# Altium PCB nrf24l01_cell(P40).PcbDoc (part 11 of 11)
Units mm, origin at the board's own origin, x right, y up, seen from the top; angles counter-clockwise.
Board outline 136.2 x 112.2 mm, 2 copper layers (TopLayer, BottomLayer); 520 components, 0 nets, 2804 pads, 1040 vias.
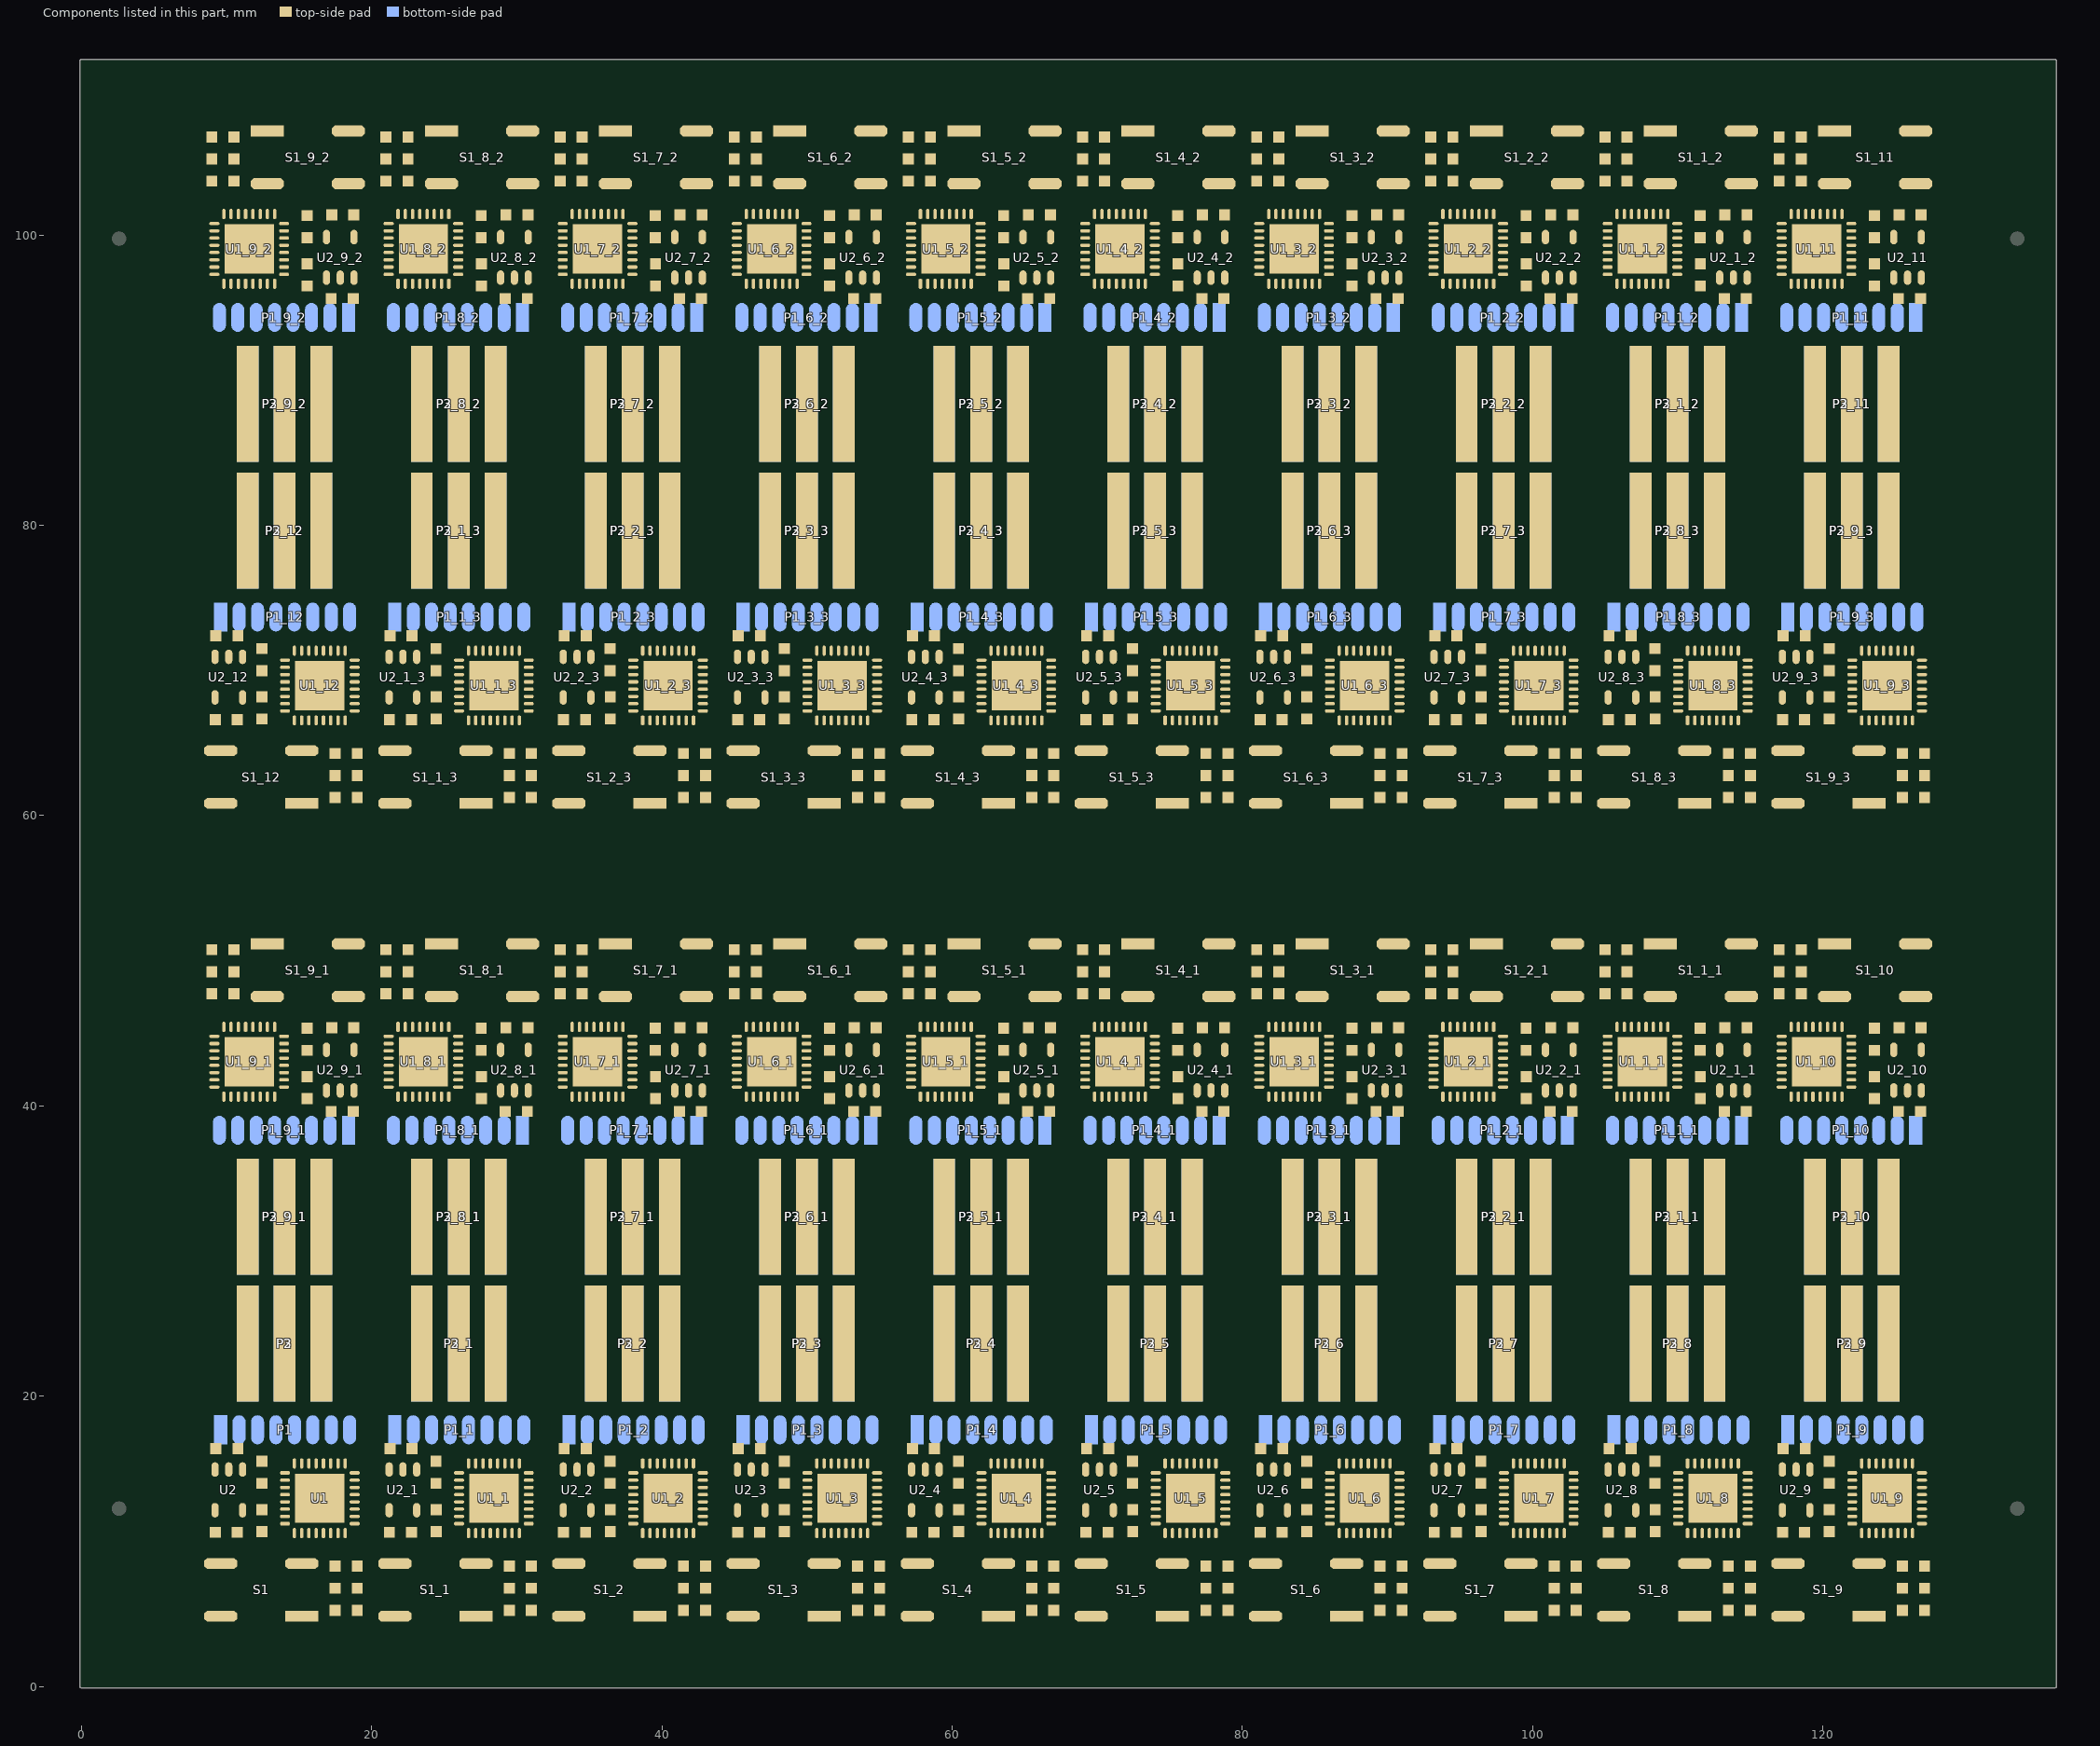
[diagram p11: the components of this part, seen from the top]

## Polygon pours and split planes (outlines as drawn) (continued)
no net on BottomLayer "TopLayer-No Net" (solid, remove dead copper): 80,19 68,19 68,5.95 79.98,5.95 80,5.93
no net on BottomLayer "TopLayer-No Net" (solid, remove dead copper): 68,19 56,19 56,5.95 67.98,5.95 68,5.93
no net on BottomLayer "TopLayer-No Net" (solid, remove dead copper): 56,19 44,19 44,5.95 55.98,5.95 56,5.93
no net on BottomLayer "TopLayer-No Net" (solid, remove dead copper): 44,19 32,19 32,5.95 43.98,5.95 44,5.93
no net on BottomLayer "TopLayer-No Net" (solid, remove dead copper): 32,19 20,19 20,5.95 31.98,5.95 32,5.93
no net on BottomLayer "TopLayer-No Net" (solid, remove dead copper): 20,19 8,19 8,5.95 19.98,5.95 20,5.93
no net on TopLayer "TopLayer-No Net" (solid, remove dead copper): 8,61.95 8.05,61.9 20,61.9 20,75 8,75
no net on TopLayer "TopLayer-No Net" (solid, remove dead copper): 20,61.95 20.05,61.9 32,61.9 32,75 20,75
no net on TopLayer "TopLayer-No Net" (solid, remove dead copper): 32,61.95 32.05,61.9 44,61.9 44,75 32,75
no net on TopLayer "TopLayer-No Net" (solid, remove dead copper): 44,61.95 44.05,61.9 56,61.9 56,75 44,75
no net on TopLayer "TopLayer-No Net" (solid, remove dead copper): 56,61.95 56.05,61.9 68,61.9 68,75 56,75
no net on TopLayer "TopLayer-No Net" (solid, remove dead copper): 68,61.95 68.05,61.9 80,61.9 80,75 68,75
no net on TopLayer "TopLayer-No Net" (solid, remove dead copper): 80,61.95 80.05,61.9 92,61.9 92,75 80,75
no net on TopLayer "TopLayer-No Net" (solid, remove dead copper): 92,61.95 92.05,61.9 104,61.9 104,75 92,75
no net on TopLayer "TopLayer-No Net" (solid, remove dead copper): 104,61.95 104.05,61.9 116,61.9 116,75 104,75
no net on TopLayer "TopLayer-No Net" (solid, remove dead copper): 116,61.95 116.05,61.9 128,61.9 128,75 116,75
no net on TopLayer "TopLayer-No Net" (solid, remove dead copper): 128,106.05 127.95,106.1 116,106.1 116,93 128,93
no net on TopLayer "TopLayer-No Net" (solid, remove dead copper): 116,106.05 115.95,106.1 104,106.1 104,93 116,93
no net on TopLayer "TopLayer-No Net" (solid, remove dead copper): 104,106.05 103.95,106.1 92,106.1 92,93 104,93
no net on TopLayer "TopLayer-No Net" (solid, remove dead copper): 92,106.05 91.95,106.1 80,106.1 80,93 92,93
no net on TopLayer "TopLayer-No Net" (solid, remove dead copper): 80,106.05 79.95,106.1 68,106.1 68,93 80,93
no net on TopLayer "TopLayer-No Net" (solid, remove dead copper): 68,106.05 67.95,106.1 56,106.1 56,93 68,93
no net on TopLayer "TopLayer-No Net" (solid, remove dead copper): 56,106.05 55.95,106.1 44,106.1 44,93 56,93
no net on TopLayer "TopLayer-No Net" (solid, remove dead copper): 44,106.05 43.95,106.1 32,106.1 32,93 44,93
no net on TopLayer "TopLayer-No Net" (solid, remove dead copper): 32,106.05 31.95,106.1 20,106.1 20,93 32,93
no net on TopLayer "TopLayer-No Net" (solid, remove dead copper): 20,106.05 19.95,106.1 8,106.1 8,93 20,93
no net on TopLayer "TopLayer-No Net" (solid, remove dead copper): 128,50.05 127.95,50.1 116,50.1 116,37 128,37
no net on TopLayer "TopLayer-No Net" (solid, remove dead copper): 116,50.05 115.95,50.1 104,50.1 104,37 116,37
no net on TopLayer "TopLayer-No Net" (solid, remove dead copper): 104,50.05 103.95,50.1 92,50.1 92,37 104,37
no net on TopLayer "TopLayer-No Net" (solid, remove dead copper): 92,50.05 91.95,50.1 80,50.1 80,37 92,37
no net on TopLayer "TopLayer-No Net" (solid, remove dead copper): 80,50.05 79.95,50.1 68,50.1 68,37 80,37
no net on TopLayer "TopLayer-No Net" (solid, remove dead copper): 68,50.05 67.95,50.1 56,50.1 56,37 68,37
no net on TopLayer "TopLayer-No Net" (solid, remove dead copper): 56,50.05 55.95,50.1 44,50.1 44,37 56,37
no net on TopLayer "TopLayer-No Net" (solid, remove dead copper): 44,50.05 43.95,50.1 32,50.1 32,37 44,37
no net on TopLayer "TopLayer-No Net" (solid, remove dead copper): 32,50.05 31.95,50.1 20,50.1 20,37 32,37
no net on TopLayer "TopLayer-No Net" (solid, remove dead copper): 20,50.05 19.95,50.1 8,50.1 8,37 20,37
no net on TopLayer "TopLayer-No Net" (solid, remove dead copper): 116,5.95 116.05,5.9 128,5.9 128,19 116,19
no net on TopLayer "TopLayer-No Net" (solid, remove dead copper): 104,5.95 104.05,5.9 116,5.9 116,19 104,19
no net on TopLayer "TopLayer-No Net" (solid, remove dead copper): 92,5.95 92.05,5.9 104,5.9 104,19 92,19
no net on TopLayer "TopLayer-No Net" (solid, remove dead copper): 80,5.95 80.05,5.9 92,5.9 92,19 80,19
no net on TopLayer "TopLayer-No Net" (solid, remove dead copper): 68,5.95 68.05,5.9 80,5.9 80,19 68,19
no net on TopLayer "TopLayer-No Net" (solid, remove dead copper): 56,5.95 56.05,5.9 68,5.9 68,19 56,19
no net on TopLayer "TopLayer-No Net" (solid, remove dead copper): 44,5.95 44.05,5.9 56,5.9 56,19 44,19
no net on TopLayer "TopLayer-No Net" (solid, remove dead copper): 32,5.95 32.05,5.9 44,5.9 44,19 32,19
no net on TopLayer "TopLayer-No Net" (solid, remove dead copper): 20,5.95 20.05,5.9 32,5.9 32,19 20,19
no net on TopLayer "TopLayer-No Net" (solid, remove dead copper): 8,5.95 8.05,5.9 20,5.9 20,19 8,19

## Keep-outs
KeepOutLayer:
  circle w0.2: c2.6,5 r1
  circle w0.2: c2.6,107 r1
  circle w0.2: c133.4,107 r1
  circle w0.2: c133.4,5 r1
  lines w0.2: 127,37 127,28 ; 128,37 129,37 129,28 129,19 128,19 ; 0,0 ccw(c0,0) 0,0 ; 0,0 8,0 ; 0,0 0,112 8,112 ; 8,0 8,19 ; 8,0 20,0 ; 8,19 9,19 9,28 ; 8,19 7,19 7,28 7,37 8,37 ; 8,37 8,56 ; 8,37 9,37 9,28 ; 8,56 8,75 ; 8,56 20,56 ; 8,75 9,75 9,84 ; 8,75 7,75 7,84 7,93 8,93 ; 8,93 8,112 ; 8,93 9,93 9,84 ; 8,112 20,112 ; 9,28 19,28 ; 9,28 19,28 ; 9,84 19,84 ; 9,84 19,84 ; 19,28 19,37 20,37 ; 19,28 19,19 20,19 ; 19,84 19,75 20,75 ; 19,84 19,93 20,93 ; 20,0 20,19 ; 20,0 32,0 ; 20,0 20,19 ; 20,19 21,19 21,28 ; 20,37 20,56 ; 20,37 21,37 21,28 ; 20,37 20,56 ; 20,56 20,75 ; 20,56 32,56 ; 20,56 20,75 ; 20,56 32,56 ; 20,75 21,75 21,84 ; 20,93 20,112 ; 20,93 21,93 21,84 ; 20,93 20,112 ; 20,112 32,112 ; 21,28 31,28 ; 21,28 31,28 ; 21,84 31,84 ; 21,84 31,84 ; 31,28 31,37 32,37 ; 31,28 31,19 32,19 ; 31,84 31,75 32,75 ; 31,84 31,93 32,93 ; 32,0 32,19 ; 32,0 44,0 ; 32,0 32,19 ; 32,19 33,19 33,28 ; 32,37 32,56 ; 32,37 33,37 33,28 ; 32,37 32,56 ; 32,56 32,75 ; 32,56 44,56 ; 32,56 32,75 ; 32,56 44,56 ; 32,75 33,75 33,84 ; 32,93 32,112 ; 32,93 33,93 33,84 ; 32,93 32,112 ; 32,112 44,112 ; 33,28 43,28 ; 33,28 43,28 ; 33,84 43,84 ; 33,84 43,84 ; 43,28 43,37 44,37 ; 43,28 43,19 44,19 ; 43,84 43,75 44,75 ; 43,84 43,93 44,93 ; 44,0 44,19 ; 44,0 56,0 ; 44,0 44,19 ; 44,19 45,19 45,28 ; 44,37 44,56 ; 44,37 45,37 45,28 ; 44,37 44,56 ; 44,56 44,75 ; 44,56 56,56 ; 44,56 44,75 ; 44,56 56,56 ; 44,75 45,75 45,84 ; 44,93 44,112 ; 44,93 45,93 45,84 ; 44,93 44,112 ; 44,112 56,112 ; 45,28 55,28 ; 45,28 55,28 ; 45,84 55,84 ; 45,84 55,84 ; 55,28 55,37 56,37 ; 55,28 55,19 56,19 ; 55,84 55,75 56,75 ; 55,84 55,93 56,93 ; 56,0 56,19 ; 56,0 68,0 ; 56,0 56,19 ; 56,19 57,19 57,28 ; 56,37 56,56 ; 56,37 57,37 57,28 ; 56,37 56,56 ; 56,56 56,75 ; 56,56 68,56 ; 56,56 56,75 ; 56,56 68,56 ; 56,75 57,75 57,84 ; 56,93 56,112 ; 56,93 57,93 57,84 ; 56,93 56,112 ; 56,112 68,112 ; 57,28 67,28 ; 57,28 67,28 ; 57,84 67,84 ; 57,84 67,84 ; 67,28 67,37 68,37 ; 67,28 67,19 68,19 ; 67,84 67,75 68,75 ; 67,84 67,93 68,93 ; 68,0 68,19 ; 68,0 80,0 ; 68,0 68,19 ; 68,19 69,19 69,28 ; 68,37 68,56 ; 68,37 69,37 69,28 ; 68,37 68,56 ; 68,56 68,75 ; 68,56 80,56 ; 68,56 68,75 ; 68,56 80,56 ; 68,75 69,75 69,84 ; 68,93 68,112 ; 68,93 69,93 69,84 ; 68,93 68,112 ; 68,112 80,112 ; 69,28 79,28 ; 69,28 79,28 ; 69,84 79,84 ; 69,84 79,84 ; 79,28 79,37 80,37 ; 79,28 79,19 80,19 ; 79,84 79,75 80,75 ; 79,84 79,93 80,93 ; 80,0 80,19 ; 80,0 92,0 ; 80,0 80,19 ; 80,19 81,19 81,28 ; 80,37 80,56 ; 80,37 81,37 81,28 ; 80,37 80,56 ; 80,56 80,75 ; 80,56 92,56 ; 80,56 80,75 ; 80,56 92,56 ; 80,75 81,75 81,84 ; 80,93 80,112 ; 80,93 81,93 81,84 ; 80,93 80,112 ; 80,112 92,112 ; 81,28 91,28 ; 81,28 91,28 ; 81,84 91,84 ; 81,84 91,84 ; 91,28 91,37 92,37 ; 91,28 91,19 92,19 ; 91,84 91,75 92,75 ; 91,84 91,93 92,93 ; 92,0 92,19 ; 92,0 104,0 ; 92,0 92,19 ; 92,19 93,19 93,28 ; 92,37 92,56 ; 92,37 93,37 93,28 ; 92,37 92,56 ; 92,56 92,75 ; 92,56 104,56 ; 92,56 92,75 ; 92,56 104,56 ; 92,75 93,75 93,84 ; 92,93 92,112 ; 92,93 93,93 93,84 ; 92,93 92,112 ; 92,112 104,112 ; 93,28 103,28 ; 93,28 103,28 ; 93,84 103,84 ; 93,84 103,84 ; 103,28 103,37 104,37 ; 103,28 103,19 104,19 ; 103,84 103,75 104,75 ; 103,84 103,93 104,93 ; 104,0 104,19 ; 104,0 116,0 ; 104,0 104,19 ; 104,19 105,19 105,28 ; 104,37 104,56 ; 104,37 105,37 105,28 ; 104,37 104,56 ; 104,56 104,75 ; 104,56 116,56 ; 104,56 104,75 ; 104,56 116,56 ; 104,75 105,75 105,84 ; 104,93 104,112 ; 104,93 105,93 105,84 ; 104,93 104,112 ; 104,112 116,112 ; 105,28 115,28 ; 105,28 115,28 ; 105,84 115,84 ; 105,84 115,84 ; 115,28 115,37 116,37 ; 115,28 115,19 116,19 ; 115,84 115,75 116,75 ; 115,84 115,93 116,93 ; 116,0 116,19 ; 116,0 128,0 ; 116,0 116,19 ; 116,19 117,19 117,28 ; 116,37 116,56 ; 116,37 117,37 117,28 ; 116,37 116,56 ; 116,56 116,75 ; 116,56 128,56 128,75 ; 116,56 116,75 ; 116,75 117,75 117,84 ; 116,93 116,112 ; 116,93 117,93 117,84 ; 116,93 116,112 ; 116,112 128,112 ; 117,28 127,28 ; 117,28 127,28 ; 117,84 127,84 ; 117,84 127,84 ; 127,28 127,19 128,19 ; 127,84 127,75 128,75 ; 127,84 127,93 128,93 ; 128,0 128,19 ; 128,0 136,0 136,112 128,112 ; 128,75 129,75 129,84 129,93 128,93 ; 128,93 128,112

## Other copper
TopLayer:
  region: 10.71,65.92 9.24,65.92 9.24,65.18 10.71,65.18
  region: 22.71,65.92 21.24,65.92 21.24,65.18 22.71,65.18
  region: 34.71,65.92 33.24,65.92 33.24,65.18 34.71,65.18
  region: 46.71,65.92 45.24,65.92 45.24,65.18 46.71,65.18
  region: 58.71,65.92 57.24,65.92 57.24,65.18 58.71,65.18
  region: 70.71,65.92 69.24,65.92 69.24,65.18 70.71,65.18
  region: 82.71,65.92 81.24,65.92 81.24,65.18 82.71,65.18
  region: 94.71,65.92 93.24,65.92 93.24,65.18 94.71,65.18
  region: 106.71,65.92 105.24,65.92 105.24,65.18 106.71,65.18
  region: 118.71,65.92 117.24,65.92 117.24,65.18 118.71,65.18
  rectangle: 125.29,102.08 126.76,102.82
  rectangle: 113.29,102.08 114.76,102.82
  rectangle: 101.29,102.08 102.76,102.82
  rectangle: 89.29,102.08 90.76,102.82
  rectangle: 77.29,102.08 78.76,102.82
  rectangle: 65.29,102.08 66.76,102.82
  rectangle: 53.29,102.08 54.76,102.82
  rectangle: 41.29,102.08 42.76,102.82
  rectangle: 29.29,102.08 30.76,102.82
  rectangle: 17.29,102.08 18.76,102.82
  rectangle: 125.29,46.08 126.76,46.82
  rectangle: 113.29,46.08 114.76,46.82
  rectangle: 101.29,46.08 102.76,46.82
  rectangle: 89.29,46.08 90.76,46.82
  rectangle: 77.29,46.08 78.76,46.82
  rectangle: 65.29,46.08 66.76,46.82
  rectangle: 53.29,46.08 54.76,46.82
  rectangle: 41.29,46.08 42.76,46.82
  rectangle: 29.29,46.08 30.76,46.82
  rectangle: 17.29,46.08 18.76,46.82
  region: 118.71,9.92 117.24,9.92 117.24,9.18 118.71,9.18
  region: 106.71,9.92 105.24,9.92 105.24,9.18 106.71,9.18
  region: 94.71,9.92 93.24,9.92 93.24,9.18 94.71,9.18
  region: 82.71,9.92 81.24,9.92 81.24,9.18 82.71,9.18
  region: 70.71,9.92 69.24,9.92 69.24,9.18 70.71,9.18
  region: 58.71,9.92 57.24,9.92 57.24,9.18 58.71,9.18
  region: 46.71,9.92 45.24,9.92 45.24,9.18 46.71,9.18
  region: 34.71,9.92 33.24,9.92 33.24,9.18 34.71,9.18
  region: 22.71,9.92 21.24,9.92 21.24,9.18 22.71,9.18
  region: 10.71,9.92 9.24,9.92 9.24,9.18 10.71,9.18
BottomLayer:
  region: 10.66,66.49 9.45,66.49 9.45,64.79 10.66,64.79
  region: 10.76,72.34 9.74,72.34 9.74,71.11 10.76,71.11
  region: 12.74,71.32 11.66,71.32 11.66,69.93 12.74,69.93
  region: 13.06,71.66 11.25,71.66 11.25,70.41 13.06,70.41
  region: 18.53,70.95 17.36,70.95 17.36,69.84 18.53,69.84
  region: 18.63,68.13 17.25,68.13 17.25,66.94 18.63,66.94
  region: 15.55,70.92 14.38,70.92 14.38,69.86 15.55,69.86
  region: 15.51,68.09 15.03,68.09 15.03,67.6 15.51,67.6
  region: 22.66,66.49 21.45,66.49 21.45,64.79 22.66,64.79
  region: 22.76,72.34 21.74,72.34 21.74,71.11 22.76,71.11
  region: 24.74,71.32 23.66,71.32 23.66,69.93 24.74,69.93
  region: 25.06,71.66 23.25,71.66 23.25,70.41 25.06,70.41
  region: 30.53,70.95 29.36,70.95 29.36,69.84 30.53,69.84
  region: 30.63,68.13 29.25,68.13 29.25,66.94 30.63,66.94
  region: 27.55,70.92 26.38,70.92 26.38,69.86 27.55,69.86
  region: 27.51,68.09 27.03,68.09 27.03,67.6 27.51,67.6
  region: 34.66,66.49 33.45,66.49 33.45,64.79 34.66,64.79
  region: 34.76,72.34 33.74,72.34 33.74,71.11 34.76,71.11
  region: 36.74,71.32 35.66,71.32 35.66,69.93 36.74,69.93
  region: 37.06,71.66 35.25,71.66 35.25,70.41 37.06,70.41
  region: 42.53,70.95 41.36,70.95 41.36,69.84 42.53,69.84
  region: 42.63,68.13 41.25,68.13 41.25,66.94 42.63,66.94
  region: 39.55,70.92 38.38,70.92 38.38,69.86 39.55,69.86
  region: 39.51,68.09 39.03,68.09 39.03,67.6 39.51,67.6
  region: 46.66,66.49 45.45,66.49 45.45,64.79 46.66,64.79
  region: 46.76,72.34 45.74,72.34 45.74,71.11 46.76,71.11
  region: 48.74,71.32 47.66,71.32 47.66,69.93 48.74,69.93
  region: 49.06,71.66 47.25,71.66 47.25,70.41 49.06,70.41
  region: 54.53,70.95 53.36,70.95 53.36,69.84 54.53,69.84
  region: 54.63,68.13 53.25,68.13 53.25,66.94 54.63,66.94
  region: 51.55,70.92 50.38,70.92 50.38,69.86 51.55,69.86
  region: 51.51,68.09 51.03,68.09 51.03,67.6 51.51,67.6
  region: 58.66,66.49 57.45,66.49 57.45,64.79 58.66,64.79
  region: 58.76,72.34 57.74,72.34 57.74,71.11 58.76,71.11
  region: 60.74,71.32 59.66,71.32 59.66,69.93 60.74,69.93
  region: 61.06,71.66 59.25,71.66 59.25,70.41 61.06,70.41
  region: 66.53,70.95 65.36,70.95 65.36,69.84 66.53,69.84
  region: 66.63,68.13 65.25,68.13 65.25,66.94 66.63,66.94
  region: 63.55,70.92 62.38,70.92 62.38,69.86 63.55,69.86
  region: 63.51,68.09 63.03,68.09 63.03,67.6 63.51,67.6
  region: 70.66,66.49 69.45,66.49 69.45,64.79 70.66,64.79
  region: 70.76,72.34 69.74,72.34 69.74,71.11 70.76,71.11
  region: 72.74,71.32 71.66,71.32 71.66,69.93 72.74,69.93
  region: 73.06,71.66 71.25,71.66 71.25,70.41 73.06,70.41
  region: 78.53,70.95 77.36,70.95 77.36,69.84 78.53,69.84
  region: 78.63,68.13 77.25,68.13 77.25,66.94 78.63,66.94
  region: 75.55,70.92 74.38,70.92 74.38,69.86 75.55,69.86
  region: 75.51,68.09 75.03,68.09 75.03,67.6 75.51,67.6
  region: 82.66,66.49 81.45,66.49 81.45,64.79 82.66,64.79
  region: 82.76,72.34 81.74,72.34 81.74,71.11 82.76,71.11
  region: 84.74,71.32 83.66,71.32 83.66,69.93 84.74,69.93
  region: 85.06,71.66 83.25,71.66 83.25,70.41 85.06,70.41
  region: 90.53,70.95 89.36,70.95 89.36,69.84 90.53,69.84
  region: 90.63,68.13 89.25,68.13 89.25,66.94 90.63,66.94
  region: 87.55,70.92 86.38,70.92 86.38,69.86 87.55,69.86
  region: 87.51,68.09 87.03,68.09 87.03,67.6 87.51,67.6
  region: 94.66,66.49 93.45,66.49 93.45,64.79 94.66,64.79
  region: 94.76,72.34 93.74,72.34 93.74,71.11 94.76,71.11
  region: 96.74,71.32 95.66,71.32 95.66,69.93 96.74,69.93
  region: 97.06,71.66 95.25,71.66 95.25,70.41 97.06,70.41
  region: 102.53,70.95 101.36,70.95 101.36,69.84 102.53,69.84
  region: 102.63,68.13 101.25,68.13 101.25,66.94 102.63,66.94
  region: 99.55,70.92 98.38,70.92 98.38,69.86 99.55,69.86
  region: 99.51,68.09 99.03,68.09 99.03,67.6 99.51,67.6
  region: 106.66,66.49 105.45,66.49 105.45,64.79 106.66,64.79
  region: 106.76,72.34 105.74,72.34 105.74,71.11 106.76,71.11
  region: 108.74,71.32 107.66,71.32 107.66,69.93 108.74,69.93
  region: 109.06,71.66 107.25,71.66 107.25,70.41 109.06,70.41
  region: 114.53,70.95 113.36,70.95 113.36,69.84 114.53,69.84
  region: 114.63,68.13 113.25,68.13 113.25,66.94 114.63,66.94
  region: 111.55,70.92 110.38,70.92 110.38,69.86 111.55,69.86
  region: 111.51,68.09 111.03,68.09 111.03,67.6 111.51,67.6
  region: 118.66,66.49 117.45,66.49 117.45,64.79 118.66,64.79
  region: 118.76,72.34 117.74,72.34 117.74,71.11 118.76,71.11
  region: 120.74,71.32 119.66,71.32 119.66,69.93 120.74,69.93
  region: 121.06,71.66 119.25,71.66 119.25,70.41 121.06,70.41
  region: 126.53,70.95 125.36,70.95 125.36,69.84 126.53,69.84
  region: 126.63,68.13 125.25,68.13 125.25,66.94 126.63,66.94
  region: 123.55,70.92 122.38,70.92 122.38,69.86 123.55,69.86
  region: 123.51,68.09 123.03,68.09 123.03,67.6 123.51,67.6
  rectangle: 125.34,101.51 126.55,103.21
  rectangle: 125.24,95.66 126.26,96.89
  rectangle: 123.26,96.68 124.34,98.07
  rectangle: 122.94,96.34 124.75,97.59
  rectangle: 117.47,97.05 118.64,98.16
  rectangle: 117.37,99.87 118.75,101.06
  rectangle: 120.45,97.08 121.62,98.14
  rectangle: 120.49,99.91 120.97,100.4
  rectangle: 113.34,101.51 114.55,103.21
  rectangle: 113.24,95.66 114.26,96.89
  rectangle: 111.26,96.68 112.34,98.07
  rectangle: 110.94,96.34 112.75,97.59
  rectangle: 105.47,97.05 106.64,98.16
  rectangle: 105.37,99.87 106.75,101.06
  rectangle: 108.45,97.08 109.62,98.14
  rectangle: 108.49,99.91 108.97,100.4
  rectangle: 101.34,101.51 102.55,103.21
  rectangle: 101.24,95.66 102.26,96.89
  rectangle: 99.26,96.68 100.34,98.07
  rectangle: 98.94,96.34 100.75,97.59
  rectangle: 93.47,97.05 94.64,98.16
  rectangle: 93.37,99.87 94.75,101.06
  rectangle: 96.45,97.08 97.62,98.14
  rectangle: 96.49,99.91 96.97,100.4
  rectangle: 89.34,101.51 90.55,103.21
  rectangle: 89.24,95.66 90.26,96.89
  rectangle: 87.26,96.68 88.34,98.07
  rectangle: 86.94,96.34 88.75,97.59
  rectangle: 81.47,97.05 82.64,98.16
  rectangle: 81.37,99.87 82.75,101.06
  rectangle: 84.45,97.08 85.62,98.14
  rectangle: 84.49,99.91 84.97,100.4
  rectangle: 77.34,101.51 78.55,103.21
  rectangle: 77.24,95.66 78.26,96.89
  rectangle: 75.26,96.68 76.34,98.07
  rectangle: 74.94,96.34 76.75,97.59
  rectangle: 69.47,97.05 70.64,98.16
  rectangle: 69.37,99.87 70.75,101.06
  rectangle: 72.45,97.08 73.62,98.14
  rectangle: 72.49,99.91 72.97,100.4
  rectangle: 65.34,101.51 66.55,103.21
  rectangle: 65.24,95.66 66.26,96.89
  rectangle: 63.26,96.68 64.34,98.07
  rectangle: 62.94,96.34 64.75,97.59
  rectangle: 57.47,97.05 58.64,98.16
  rectangle: 57.37,99.87 58.75,101.06
  rectangle: 60.45,97.08 61.62,98.14
  rectangle: 60.49,99.91 60.97,100.4
  rectangle: 53.34,101.51 54.55,103.21
  rectangle: 53.24,95.66 54.26,96.89
  rectangle: 51.26,96.68 52.34,98.07
  rectangle: 50.94,96.34 52.75,97.59
  rectangle: 45.47,97.05 46.64,98.16
  rectangle: 45.37,99.87 46.75,101.06
  rectangle: 48.45,97.08 49.62,98.14
  rectangle: 48.49,99.91 48.97,100.4
  rectangle: 41.34,101.51 42.55,103.21
  rectangle: 41.24,95.66 42.26,96.89
  rectangle: 39.26,96.68 40.34,98.07
  rectangle: 38.94,96.34 40.75,97.59
  rectangle: 33.47,97.05 34.64,98.16
  rectangle: 33.37,99.87 34.75,101.06
  rectangle: 36.45,97.08 37.62,98.14
  rectangle: 36.49,99.91 36.97,100.4
  rectangle: 29.34,101.51 30.55,103.21
  rectangle: 29.24,95.66 30.26,96.89
  rectangle: 27.26,96.68 28.34,98.07
  rectangle: 26.94,96.34 28.75,97.59
  rectangle: 21.47,97.05 22.64,98.16
  rectangle: 21.37,99.87 22.75,101.06
  rectangle: 24.45,97.08 25.62,98.14
  rectangle: 24.49,99.91 24.97,100.4
  rectangle: 17.34,101.51 18.55,103.21
  rectangle: 17.24,95.66 18.26,96.89
  rectangle: 15.26,96.68 16.34,98.07
  rectangle: 14.94,96.34 16.75,97.59
  rectangle: 9.47,97.05 10.64,98.16
  rectangle: 9.37,99.87 10.75,101.06
  rectangle: 12.45,97.08 13.62,98.14
  rectangle: 12.49,99.91 12.97,100.4
  rectangle: 125.34,45.51 126.55,47.21
  rectangle: 125.24,39.66 126.26,40.89
  rectangle: 123.26,40.68 124.34,42.07
  rectangle: 122.94,40.34 124.75,41.59
  rectangle: 117.47,41.05 118.64,42.16
  rectangle: 117.37,43.87 118.75,45.06
  rectangle: 120.45,41.08 121.62,42.14
  rectangle: 120.49,43.91 120.97,44.4
  rectangle: 113.34,45.51 114.55,47.21
  rectangle: 113.24,39.66 114.26,40.89
  rectangle: 111.26,40.68 112.34,42.07
  rectangle: 110.94,40.34 112.75,41.59
  rectangle: 105.47,41.05 106.64,42.16
  rectangle: 105.37,43.87 106.75,45.06
  rectangle: 108.45,41.08 109.62,42.14
  rectangle: 108.49,43.91 108.97,44.4
  rectangle: 101.34,45.51 102.55,47.21
  rectangle: 101.24,39.66 102.26,40.89
  rectangle: 99.26,40.68 100.34,42.07
  rectangle: 98.94,40.34 100.75,41.59
  rectangle: 93.47,41.05 94.64,42.16
  rectangle: 93.37,43.87 94.75,45.06
  rectangle: 96.45,41.08 97.62,42.14
  rectangle: 96.49,43.91 96.97,44.4
  rectangle: 89.34,45.51 90.55,47.21
  rectangle: 89.24,39.66 90.26,40.89
  rectangle: 87.26,40.68 88.34,42.07
  rectangle: 86.94,40.34 88.75,41.59
  rectangle: 81.47,41.05 82.64,42.16
  rectangle: 81.37,43.87 82.75,45.06
  rectangle: 84.45,41.08 85.62,42.14
  rectangle: 84.49,43.91 84.97,44.4
  rectangle: 77.34,45.51 78.55,47.21
  rectangle: 77.24,39.66 78.26,40.89
  rectangle: 75.26,40.68 76.34,42.07
  rectangle: 74.94,40.34 76.75,41.59
  rectangle: 69.47,41.05 70.64,42.16
  rectangle: 69.37,43.87 70.75,45.06
  rectangle: 72.45,41.08 73.62,42.14
  rectangle: 72.49,43.91 72.97,44.4
  rectangle: 65.34,45.51 66.55,47.21
  rectangle: 65.24,39.66 66.26,40.89
  rectangle: 63.26,40.68 64.34,42.07
  rectangle: 62.94,40.34 64.75,41.59
  rectangle: 57.47,41.05 58.64,42.16
  rectangle: 57.37,43.87 58.75,45.06
  rectangle: 60.45,41.08 61.62,42.14
  rectangle: 60.49,43.91 60.97,44.4
  rectangle: 53.34,45.51 54.55,47.21
  rectangle: 53.24,39.66 54.26,40.89
  rectangle: 51.26,40.68 52.34,42.07
  rectangle: 50.94,40.34 52.75,41.59
  rectangle: 45.47,41.05 46.64,42.16
  rectangle: 45.37,43.87 46.75,45.06
  rectangle: 48.45,41.08 49.62,42.14
  rectangle: 48.49,43.91 48.97,44.4
  rectangle: 41.34,45.51 42.55,47.21
  rectangle: 41.24,39.66 42.26,40.89
  rectangle: 39.26,40.68 40.34,42.07
  rectangle: 38.94,40.34 40.75,41.59
  rectangle: 33.47,41.05 34.64,42.16
  rectangle: 33.37,43.87 34.75,45.06
  rectangle: 36.45,41.08 37.62,42.14
  rectangle: 36.49,43.91 36.97,44.4
  rectangle: 29.34,45.51 30.55,47.21
  rectangle: 29.24,39.66 30.26,40.89
  rectangle: 27.26,40.68 28.34,42.07
  rectangle: 26.94,40.34 28.75,41.59
  rectangle: 21.47,41.05 22.64,42.16
  rectangle: 21.37,43.87 22.75,45.06
  rectangle: 24.45,41.08 25.62,42.14
  rectangle: 24.49,43.91 24.97,44.4
  rectangle: 17.34,45.51 18.55,47.21
  rectangle: 17.24,39.66 18.26,40.89
  rectangle: 15.26,40.68 16.34,42.07
  rectangle: 14.94,40.34 16.75,41.59
  rectangle: 9.47,41.05 10.64,42.16
  rectangle: 9.37,43.87 10.75,45.06
  rectangle: 12.45,41.08 13.62,42.14
  rectangle: 12.49,43.91 12.97,44.4
  region: 123.51,12.09 123.03,12.09 123.03,11.6 123.51,11.6
  region: 123.55,14.92 122.38,14.92 122.38,13.86 123.55,13.86
  region: 126.63,12.13 125.25,12.13 125.25,10.94 126.63,10.94
  region: 126.53,14.95 125.36,14.95 125.36,13.84 126.53,13.84
  region: 121.06,15.66 119.25,15.66 119.25,14.41 121.06,14.41
  region: 120.74,15.32 119.66,15.32 119.66,13.93 120.74,13.93
  region: 118.76,16.34 117.74,16.34 117.74,15.11 118.76,15.11
  region: 118.66,10.49 117.45,10.49 117.45,8.79 118.66,8.79
  region: 111.51,12.09 111.03,12.09 111.03,11.6 111.51,11.6
  region: 111.55,14.92 110.38,14.92 110.38,13.86 111.55,13.86
  region: 114.63,12.13 113.25,12.13 113.25,10.94 114.63,10.94
  region: 114.53,14.95 113.36,14.95 113.36,13.84 114.53,13.84
  region: 109.06,15.66 107.25,15.66 107.25,14.41 109.06,14.41
  region: 108.74,15.32 107.66,15.32 107.66,13.93 108.74,13.93
  region: 106.76,16.34 105.74,16.34 105.74,15.11 106.76,15.11
  region: 106.66,10.49 105.45,10.49 105.45,8.79 106.66,8.79
  region: 99.51,12.09 99.03,12.09 99.03,11.6 99.51,11.6
  region: 99.55,14.92 98.38,14.92 98.38,13.86 99.55,13.86
  region: 102.63,12.13 101.25,12.13 101.25,10.94 102.63,10.94
  region: 102.53,14.95 101.36,14.95 101.36,13.84 102.53,13.84
  region: 97.06,15.66 95.25,15.66 95.25,14.41 97.06,14.41
  region: 96.74,15.32 95.66,15.32 95.66,13.93 96.74,13.93
  region: 94.76,16.34 93.74,16.34 93.74,15.11 94.76,15.11
  region: 94.66,10.49 93.45,10.49 93.45,8.79 94.66,8.79
  region: 87.51,12.09 87.03,12.09 87.03,11.6 87.51,11.6
  region: 87.55,14.92 86.38,14.92 86.38,13.86 87.55,13.86
  region: 90.63,12.13 89.25,12.13 89.25,10.94 90.63,10.94
  region: 90.53,14.95 89.36,14.95 89.36,13.84 90.53,13.84
  region: 85.06,15.66 83.25,15.66 83.25,14.41 85.06,14.41
  region: 84.74,15.32 83.66,15.32 83.66,13.93 84.74,13.93
  region: 82.76,16.34 81.74,16.34 81.74,15.11 82.76,15.11
  region: 82.66,10.49 81.45,10.49 81.45,8.79 82.66,8.79
  region: 75.51,12.09 75.03,12.09 75.03,11.6 75.51,11.6
  region: 75.55,14.92 74.38,14.92 74.38,13.86 75.55,13.86
  region: 78.63,12.13 77.25,12.13 77.25,10.94 78.63,10.94
  region: 78.53,14.95 77.36,14.95 77.36,13.84 78.53,13.84
  region: 73.06,15.66 71.25,15.66 71.25,14.41 73.06,14.41
  region: 72.74,15.32 71.66,15.32 71.66,13.93 72.74,13.93
  region: 70.76,16.34 69.74,16.34 69.74,15.11 70.76,15.11
  region: 70.66,10.49 69.45,10.49 69.45,8.79 70.66,8.79
  region: 63.51,12.09 63.03,12.09 63.03,11.6 63.51,11.6
  region: 63.55,14.92 62.38,14.92 62.38,13.86 63.55,13.86
  region: 66.63,12.13 65.25,12.13 65.25,10.94 66.63,10.94
  region: 66.53,14.95 65.36,14.95 65.36,13.84 66.53,13.84
  region: 61.06,15.66 59.25,15.66 59.25,14.41 61.06,14.41
  region: 60.74,15.32 59.66,15.32 59.66,13.93 60.74,13.93
  region: 58.76,16.34 57.74,16.34 57.74,15.11 58.76,15.11
  region: 58.66,10.49 57.45,10.49 57.45,8.79 58.66,8.79
  region: 51.51,12.09 51.03,12.09 51.03,11.6 51.51,11.6
  region: 51.55,14.92 50.38,14.92 50.38,13.86 51.55,13.86
  region: 54.63,12.13 53.25,12.13 53.25,10.94 54.63,10.94
  region: 54.53,14.95 53.36,14.95 53.36,13.84 54.53,13.84
  region: 49.06,15.66 47.25,15.66 47.25,14.41 49.06,14.41
  region: 48.74,15.32 47.66,15.32 47.66,13.93 48.74,13.93
  region: 46.76,16.34 45.74,16.34 45.74,15.11 46.76,15.11
  region: 46.66,10.49 45.45,10.49 45.45,8.79 46.66,8.79
  region: 39.51,12.09 39.03,12.09 39.03,11.6 39.51,11.6
  region: 39.55,14.92 38.38,14.92 38.38,13.86 39.55,13.86
  region: 42.63,12.13 41.25,12.13 41.25,10.94 42.63,10.94
  region: 42.53,14.95 41.36,14.95 41.36,13.84 42.53,13.84
  region: 37.06,15.66 35.25,15.66 35.25,14.41 37.06,14.41
  region: 36.74,15.32 35.66,15.32 35.66,13.93 36.74,13.93
  region: 34.76,16.34 33.74,16.34 33.74,15.11 34.76,15.11
  region: 34.66,10.49 33.45,10.49 33.45,8.79 34.66,8.79
  region: 27.51,12.09 27.03,12.09 27.03,11.6 27.51,11.6
  region: 27.55,14.92 26.38,14.92 26.38,13.86 27.55,13.86
  region: 30.63,12.13 29.25,12.13 29.25,10.94 30.63,10.94
  region: 30.53,14.95 29.36,14.95 29.36,13.84 30.53,13.84
  region: 25.06,15.66 23.25,15.66 23.25,14.41 25.06,14.41
  region: 24.74,15.32 23.66,15.32 23.66,13.93 24.74,13.93
  region: 22.76,16.34 21.74,16.34 21.74,15.11 22.76,15.11
  region: 22.66,10.49 21.45,10.49 21.45,8.79 22.66,8.79
  region: 15.51,12.09 15.03,12.09 15.03,11.6 15.51,11.6
  region: 15.55,14.92 14.38,14.92 14.38,13.86 15.55,13.86
  region: 18.63,12.13 17.25,12.13 17.25,10.94 18.63,10.94
  region: 18.53,14.95 17.36,14.95 17.36,13.84 18.53,13.84
  region: 13.06,15.66 11.25,15.66 11.25,14.41 13.06,14.41
  region: 12.74,15.32 11.66,15.32 11.66,13.93 12.74,13.93
  region: 10.76,16.34 9.74,16.34 9.74,15.11 10.76,15.11
  region: 10.66,10.49 9.45,10.49 9.45,8.79 10.66,8.79

## Silkscreen, mask and mechanical layers (free items; w line width, h text height)
TopOverlay:
  text "IQIYI" at 12.22,110.17 h1.8
  text "IQIYI" at 24.22,110.17 h1.8
  text "IQIYI" at 36.22,110.17 h1.8
  text "IQIYI" at 48.22,110.17 h1.8
  text "IQIYI" at 60.22,110.17 h1.8
  text "IQIYI" at 72.22,110.17 h1.8
  text "IQIYI" at 84.22,110.17 h1.8
  text "IQIYI" at 96.22,110.17 h1.8
  text "IQIYI" at 108.22,110.17 h1.8
  text "IQIYI" at 120.22,110.17 h1.8
  text "NRF24L01 - V1.0" at 9.1,108.75 h1.4
  text "NRF24L01 - V1.0" at 21.1,108.75 h1.4
  text "NRF24L01 - V1.0" at 33.1,108.75 h1.4
  text "NRF24L01 - V1.0" at 45.1,108.75 h1.4
  text "NRF24L01 - V1.0" at 57.1,108.75 h1.4
  text "NRF24L01 - V1.0" at 69.1,108.75 h1.4
  text "NRF24L01 - V1.0" at 81.1,108.75 h1.4
  text "NRF24L01 - V1.0" at 93.1,108.75 h1.4
  text "NRF24L01 - V1.0" at 105.1,108.75 h1.4
  text "NRF24L01 - V1.0" at 117.1,108.75 h1.4
  text "NRF24L01 - V1.0" at 18.9,59.25 h1.4 r180
  text "NRF24L01 - V1.0" at 30.9,59.25 h1.4 r180
  text "NRF24L01 - V1.0" at 42.9,59.25 h1.4 r180
  text "NRF24L01 - V1.0" at 54.9,59.25 h1.4 r180
  text "NRF24L01 - V1.0" at 66.9,59.25 h1.4 r180
  text "NRF24L01 - V1.0" at 78.9,59.25 h1.4 r180
  text "NRF24L01 - V1.0" at 90.9,59.25 h1.4 r180
  text "NRF24L01 - V1.0" at 102.9,59.25 h1.4 r180
  text "NRF24L01 - V1.0" at 114.9,59.25 h1.4 r180
  text "NRF24L01 - V1.0" at 126.9,59.25 h1.4 r180
  text "IQIYI" at 15.78,57.83 h1.8 r180
  text "IQIYI" at 27.78,57.83 h1.8 r180
  text "IQIYI" at 39.78,57.83 h1.8 r180
  text "IQIYI" at 51.78,57.83 h1.8 r180
  text "IQIYI" at 63.78,57.83 h1.8 r180
  text "IQIYI" at 75.78,57.83 h1.8 r180
  text "IQIYI" at 87.78,57.83 h1.8 r180
  text "IQIYI" at 99.78,57.83 h1.8 r180
  text "IQIYI" at 111.78,57.83 h1.8 r180
  text "IQIYI" at 123.78,57.83 h1.8 r180
  text "IQIYI" at 3.98,56.83 h4 r90
  text "IQIYI" at 12.22,54.17 h1.8
  text "IQIYI" at 24.22,54.17 h1.8
  text "IQIYI" at 36.22,54.17 h1.8
  text "IQIYI" at 48.22,54.17 h1.8
  text "IQIYI" at 60.22,54.17 h1.8
  text "IQIYI" at 72.22,54.17 h1.8
  text "IQIYI" at 84.22,54.17 h1.8
  text "IQIYI" at 96.22,54.17 h1.8
  text "IQIYI" at 108.22,54.17 h1.8
  text "IQIYI" at 120.22,54.17 h1.8
  text "NRF24L01 - V1.0" at 9.1,52.75 h1.4
  text "NRF24L01 - V1.0" at 21.1,52.75 h1.4
  text "NRF24L01 - V1.0" at 33.1,52.75 h1.4
  text "NRF24L01 - V1.0" at 45.1,52.75 h1.4
  text "NRF24L01 - V1.0" at 57.1,52.75 h1.4
  text "NRF24L01 - V1.0" at 69.1,52.75 h1.4
  text "NRF24L01 - V1.0" at 81.1,52.75 h1.4
  text "NRF24L01 - V1.0" at 93.1,52.75 h1.4
  text "NRF24L01 - V1.0" at 105.1,52.75 h1.4
  text "NRF24L01 - V1.0" at 117.1,52.75 h1.4
  text "NRF24L01 - V1.0" at 6.54,49.48 h3 r90
  text "NRF24L01 - V1.0" at 18.9,3.25 h1.4 r180
  text "NRF24L01 - V1.0" at 30.9,3.25 h1.4 r180
  text "NRF24L01 - V1.0" at 42.9,3.25 h1.4 r180
  text "NRF24L01 - V1.0" at 54.9,3.25 h1.4 r180
  text "NRF24L01 - V1.0" at 66.9,3.25 h1.4 r180
  text "NRF24L01 - V1.0" at 78.9,3.25 h1.4 r180
  text "NRF24L01 - V1.0" at 90.9,3.25 h1.4 r180
  text "NRF24L01 - V1.0" at 102.9,3.25 h1.4 r180
  text "NRF24L01 - V1.0" at 114.9,3.25 h1.4 r180
  text "NRF24L01 - V1.0" at 126.9,3.25 h1.4 r180
  text "IQIYI" at 15.78,1.83 h1.8 r180
  text "IQIYI" at 27.78,1.83 h1.8 r180
  text "IQIYI" at 39.78,1.83 h1.8 r180
  text "IQIYI" at 51.78,1.83 h1.8 r180
  text "IQIYI" at 63.78,1.83 h1.8 r180
  text "IQIYI" at 75.78,1.83 h1.8 r180
  text "IQIYI" at 87.78,1.83 h1.8 r180
  text "IQIYI" at 99.78,1.83 h1.8 r180
  text "IQIYI" at 111.78,1.83 h1.8 r180
  text "IQIYI" at 123.78,1.83 h1.8 r180
Mechanical15:
  drawing of 151 lines, arcs and shapes, not listed